# EAGLE board MSP_Lunchbox_OpenSource_v1 (EAGLE 9.5.2)
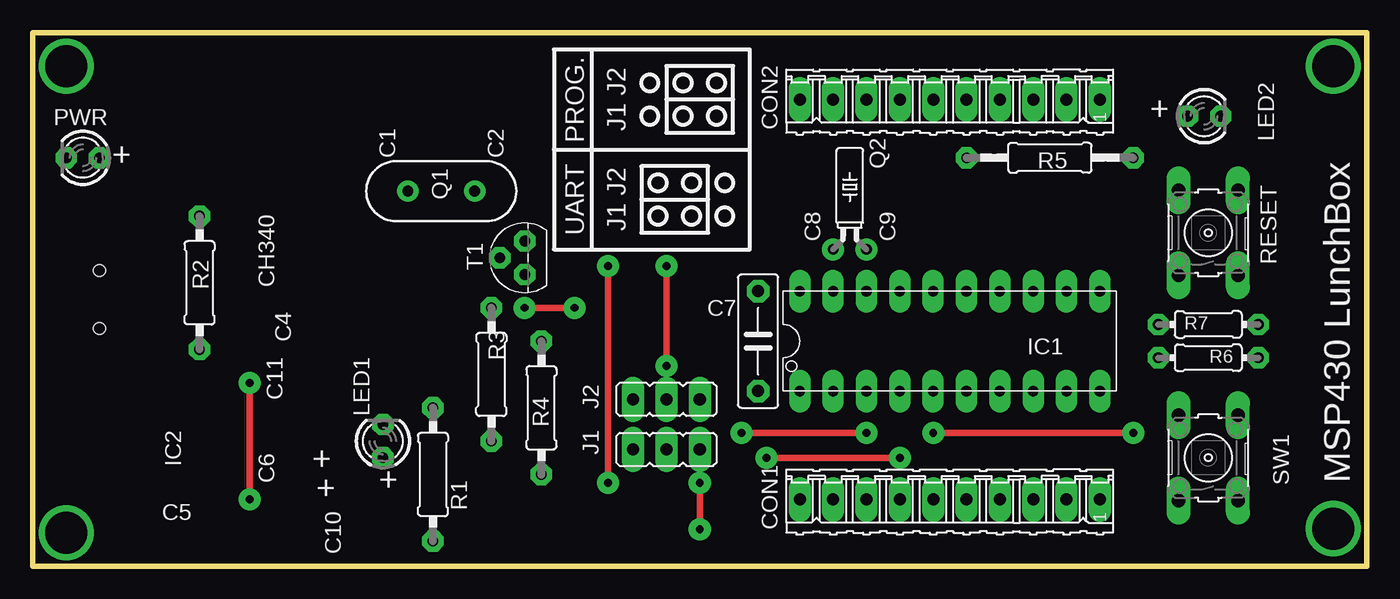
[diagram p0: board, top side]
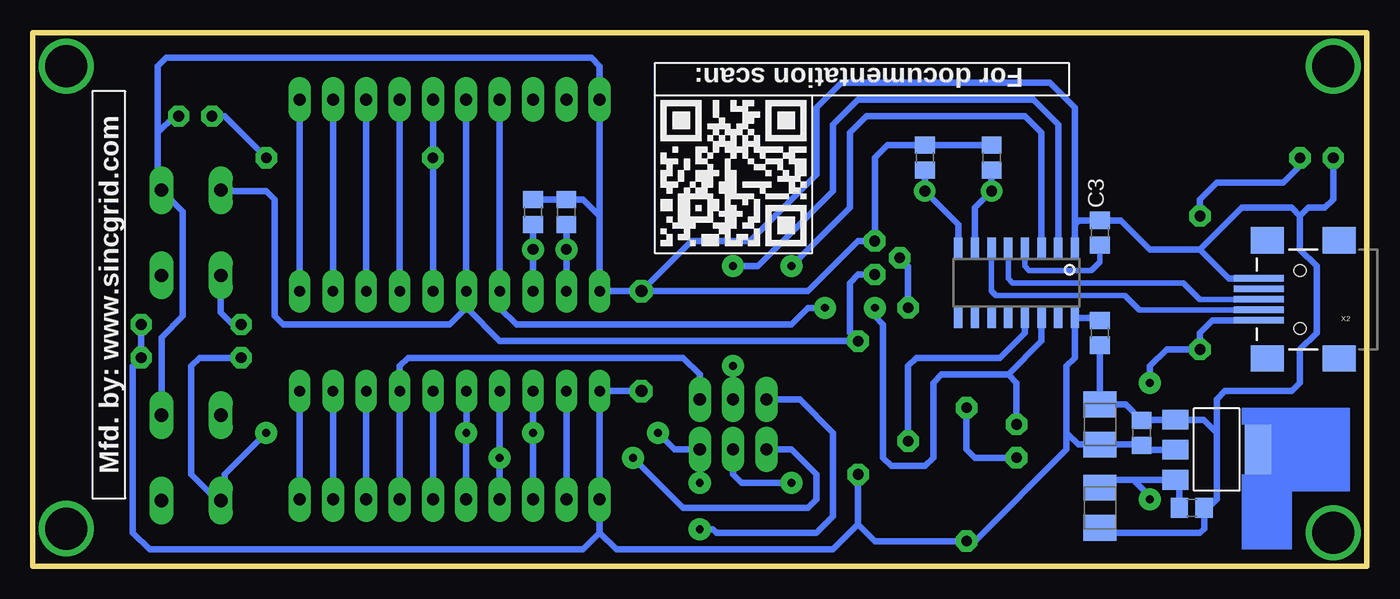
[diagram p1: board, bottom side, seen from below]

Size 101.6 x 40.64 mm. Coordinates in mm from the lower left corner, seen from the top.
Outline: 0,40.64 101.6,40.64 101.6,0 0,0 0,40.64
Copper layers (1*16): Top 0.035mm / dielectric 1.5mm / Bottom 0.035mm
Design rules "default *": minimum track width 10mil, minimum drill 24mil, track to track 16mil, track to pad 16mil, pad to pad 16mil, via to via 16mil, smd to smd 8mil, copper to edge 40mil, drill to drill 8mil, minimum pad ring 16mil, minimum via ring 8mil, stop-mask expansion 4mil, vias tented up to drill 0mil, thermal gap 10mil

## Footprints (pad centres in the part's own frame; a part is rotated, then mirrored left to right if it is on the bottom)
C0805 = smd 1.3 x 1.5: 1 -0.95,0; 2 0.95,0
C075-032X103 = drill 0.914 octagon: 1 -3.81,0; 2 3.81,0
B/3528-21R = smd 1.95 x 2.5: + 1.525,0; - -1.525,0
SOIC16 = smd 0.635 x 1.524: 1 -4.445,-2.695; 2 -3.175,-2.695; 3 -1.905,-2.695; 4 -0.635,-2.695; 5 0.635,-2.695; 6 1.905,-2.695; 7 3.175,-2.695; 8 4.445,-2.695; 9 4.445,2.695; 10 3.175,2.695; 11 1.905,2.695; 12 0.635,2.695; 13 -0.635,2.695; 14 -1.905,2.695; 15 -3.175,2.695; 16 -4.445,2.695
10P = drill 0.914 long: 1 -11.43,0; 2 -8.89,0; 3 -6.35,0; 4 -3.81,0; 5 -1.27,0; 6 1.27,0; 7 3.81,0; 8 6.35,0; 9 8.89,0; 10 11.43,0
G2553-DIP20 = drill 0.813 long: 1 -10.165,-3.81; 2 -7.625,-3.81; 3 -5.085,-3.81; 4 -2.545,-3.81; 5 -0.005,-3.81; 6 2.535,-3.81; 7 5.075,-3.81; 8 7.615,-3.81; 9 10.155,-3.81; 10 12.695,-3.81; 11 12.695,3.81; 12 10.155,3.81; 13 7.615,3.81; 14 5.075,3.81; 15 2.535,3.81; 16 -0.005,3.81; 17 -2.545,3.81; 18 -5.085,3.81; 19 -7.625,3.81; 20 -10.165,3.81
SOT223 = smd 1.499 x 2.007: 1 -2.261,-3.15; 2 0.025,-3.15; 3 2.311,-3.15 | smd 3.81 x 2.007: 4 0,3.15
JP2 = drill 0.914 long: 1 -2.54,0; 2 0,0; 3 2.54,0
LED3MM = drill 0.813 octagon: A -1.27,0; K 1.27,0
HC49US = drill 0.813: 1 -2.54,0; 2 2.54,0
TC26H = drill 0.813 pad 1.676: 1 -1.27,0; 2 1.27,0
0207/10 = drill 0.813 octagon: 1 -5.08,0; 2 5.08,0
0207/12 = drill 0.813 octagon: 1 -6.35,0; 2 6.35,0
0204/7 = drill 0.813 octagon: 1 -3.81,0; 2 3.81,0
B3F-10XX = drill 1.016 long: 1 -3.251,2.261; 2 3.251,2.261; 3 -3.251,-2.261; 4 3.251,-2.261
TO92 = drill 0.813 octagon: 1 1.27,0; 2 0,1.905; 3 -1.27,0
USB-MINIB = smd 3.81 x 0.5: D+ 3.135,0; D- 3.135,0.8; GND 3.135,-1.6; ID 3.135,-0.8; VBUS 3.135,1.6 | smd 2.5 x 2: GND@1 -3,-4.5; GND@2 -3,4.5; GND@3 2.5,4.5; GND@4 2.5,-4.5 | hole 0.9: 0,2.2; 0,-2.2

## Placement (x,y rotation side)
C1  22p  [C0805]  28.57,31.11 90 bottom
C2  22p  [C0805]  33.66,31.11 90 bottom
C3  0.1u  [C0805]  20.32,25.4 90 bottom
C4  0.1u  [C0805]  20.32,17.78 270 bottom
C5  0.1u  [C0805]  13.34,4.45 0 bottom
C6  0.1u  [C0805]  17.14,10.16 90 bottom
C7  0.1u  [C075-032X103]  55.24,17.14 90 top
C8  22p  [C0805]  60.96,26.99 90 bottom
C9  22p  [C0805]  63.5,26.99 90 bottom
C10  10u  [B/3528-21R]  20.32,4.45 90 bottom
C11  10u  [B/3528-21R]  20.32,10.79 270 bottom
CH340  CH340  [SOIC16]  26.67,21.59 180 bottom
CON1  [10P]  69.85,5.08 180 top
CON2  [10P]  69.85,35.56 180 top
IC1  MSP430G2553DIP20  [G2553-DIP20]  68.58,17.14 0 top
IC2  REG1117  [SOT223]  11.43,8.89 270 bottom
J1  [JP2]  48.26,8.89 180 top
J2  [JP2]  48.26,12.7 0 top
LED1  LED3MM  [LED3MM]  26.67,9.53 90 top
LED2  LED3MM  [LED3MM]  89.22,34.29 0 top
PWR  LED3MM  [LED3MM]  3.81,31.11 180 top
Q1  12MHz  [HC49US]  31.11,28.57 0 top
Q2  32KHz  [TC26H]  62.23,24.13 0 top
R1  1k  [0207/10]  30.48,6.99 90 top
R2  1k  [0207/10]  12.7,21.59 90 top
R3  1k  [0207/10]  34.92,14.61 90 top
R4  1k  [0207/10]  38.73,12.06 270 top
R5  1k  [0207/12]  77.47,31.11 0 top
R6  1k  [0204/7]  89.53,15.88 180 top
R7  1k  [0204/7]  89.53,18.41 180 top
RESET  OMRON_SWITCH_10-XX  [B3F-10XX]  89.53,25.4 90 top
SW1  OMRON_SWITCH_10-XX  [B3F-10XX]  89.53,8.26 90 top
T1  BC547  [TO92]  37.47,23.5 90 top
X2  USBSMD  [USB-MINIB]  5.08,20.32 180 bottom

## Library data of the parts
C1-C11 R1-R7 = rcl
CH340 = usb-serial
CON1 CON2 = con-amp-quick; OC_FARNELL: unknown; OC_NEWARK: unknown
IC1 IC2 Q2 RESET SW1 = CEDT_JANUARY_2015_v5
J1 J2 = jumper
LED1 LED2 PWR = CEDT_JANUARY_2015_v5_a
Q1 = CEDT_JANUARY_2015_v4
T1 = msp framework
X2 = CEDTv82

## Nets
1.0: CON1.9 IC1.2
1.1: CON1.8 IC1.3 J1.1 J2.1
1.2: CON1.7 IC1.4 J1.3
1.3: CON1.6 IC1.5 R6.2 SW1.1
1.4: CON1.5 IC1.6
1.5: CON1.4 IC1.7 J2.3
1.6: CON2.4 IC1.14
1.7: CON2.5 IC1.15 R5.1
2.0: CON1.3 IC1.8
2.1: CON1.2 IC1.9
2.2: CON1.1 IC1.10
2.3: CON2.1 IC1.11
2.4: CON2.2 IC1.12
2.5: CON2.3 IC1.13
+3V3: C4.1 C6.1 C7.1 C11.+ CH340.16 CON1.10 IC1.1 IC2.2 R1.1 R4.2 R6.1 R7.1
+5V: C5.1 C10.+ IC2.3 R2.1 X2.VBUS
DM: CH340.6 X2.D-
DP: CH340.5 X2.D+
DTR: CH340.13 R3.1
GND: C1.2 C2.2 C3.2 C4.2 C5.2 C6.2 C7.2 C8.2 C9.2 C10.- C11.- CH340.1 CON2.10 IC1.20 IC2.1 LED2.K PWR.K RESET.4 SW1.4 T1.1 X2.GND
N$1: LED1.A R1.2
N$2: PWR.A R2.2
N$3: C1.1 CH340.7 Q1.1
N$4: C2.1 CH340.8 Q1.2
N$5: LED2.A R5.2
N$6: R7.2 RESET.1
N$10: R3.2 T1.2
N$11: C3.1 CH340.4
N$14: CON2.9
N$15: CON2.8
RESET: CON2.6 IC1.16 R4.1 RESET.2 T1.3
RTS/TEST: CH340.14 CON2.7 IC1.17 LED1.K
RXD: CH340.3 J1.2
TXD: CH340.2 J2.2
XIN: C8.1 IC1.19 Q2.1
XOUT: C9.1 IC1.18 Q2.2

## Tracks (layer width: path | path; a pad name or v marks a point on that pad's centre or on a via)
1.0
  Bottom 0.508: IC1.2 CON1.9
1.1  (via drill 0.6 pad 1.68)
  Top 0.508: v53.98,10.16 v63.5,10.16 | v50.8,2.79 v50.8,6.35
  Bottom 0.508: IC1.3 v63.5,10.16 CON1.8 | J2.1 43.18,12.7 40.64,10.16 40.64,3.81 41.91,2.54 49.53,2.54 49.78,2.79 v50.8,2.79 | v50.8,6.35 J1.1 52.7,8.89 v53.98,10.16
1.2  (via drill 0.6 pad 1.68)
  Top 0.508: v55.88,8.26 v66.03,8.26
  Bottom 0.508: IC1.4 v66.03,8.26 v66.04,8.25 CON1.7 | J1.3 43.81,8.89 41.91,6.99 41.91,5.08 42.55,4.45 52.07,4.45 v55.88,8.26
1.3  (via drill 0.6 pad 1.68)
  Top 0.508: v68.58,10.16 v83.82,10.16
  Bottom 0.508: R6.2 88.9,15.88 89.53,15.24 89.53,6.99 87.55,5 SW1.1 87,5.28 87,6.99 v83.82,10.16 | IC1.5 v68.58,10.16 CON1.6
1.4
  Bottom 0.508: CON1.5 IC1.6
1.5
  Bottom 0.508: J2.3 50.8,14.61 52.07,15.88 73.03,15.88 73.66,15.24 IC1.7 CON1.4
1.6
  Bottom 0.508: CON2.4 IC1.14
1.7
  Bottom 0.508: CON2.5 R5.1 IC1.15
2.0
  Bottom 0.508: CON1.3 IC1.8
2.1
  Bottom 0.508: CON1.2 IC1.9
2.2
  Bottom 0.508: CON1.1 IC1.10
2.3
  Bottom 0.508: CON2.1 IC1.11
2.4
  Bottom 0.508: CON2.2 IC1.12
2.5
  Bottom 0.508: CON2.3 IC1.13
+3V3
  Bottom 0.508: C4.1 20.48,18.89 CH340.16 22.23,15.88 22.86,15.24 22.86,10.16 | R7.1 R6.1 93.98,15.24 93.98,2.54 92.71,1.27 59.69,1.27 58.42,2.54 | C7.1 IC1.1 CON1.10 58.42,2.54 | 58.42,2.54 57.15,1.27 40.64,1.27 38.73,3.17 | R4.2 38.73,3.17 | 38.73,3.17 37.47,1.91 R1.1 29.84,1.91 22.86,8.89 22.86,10.16 | 22.86,10.16 21.97,9.27 C11.+ 17.2,9.27 C6.1 16.8,8.87 IC2.2
+5V  (via drill 0.6 pad 1.68)
  Top 0.508: v16.51,13.97 v16.51,5.08
  Bottom 0.508: X2.VBUS 11.76,18.72 12.7,17.78 R2.1 15.24,16.51 16.51,15.24 v16.51,13.97 | 17.78,6.58 IC2.3 14.29,6.28 C5.1 | 17.78,6.58 19.71,6.58 C10.+ | v16.51,5.08 16.51,5.31 17.78,6.58
DM
  Bottom 0.406: CH340.6 28.57,20.95 28.26,20.64 18.41,20.64 17.3,19.52 X2.D-
DP
  Bottom 0.406: CH340.5 27.3,21.91 26.99,21.59 13.97,21.59 12.7,20.32 X2.D+
DTR
  Bottom 0.508: CH340.13 26.04,17.78 27.94,15.88 34.29,15.88 34.92,15.24 R3.1
GND
  Bottom 0.508: 22.23,26.04 21.91,26.35 C3.2 18.73,26.35 16.51,24.13 12.7,24.13 | 22.23,26.04 CH340.1 | C1.2 C2.2 36.52,32.06 37.47,31.11 T1.1 38.73,24.77 42.55,20.95 C7.2 | 12.7,24.13 10.49,21.92 X2.GND | C9.2 C8.2 59.69,27.94 58.42,26.67 | SW1.4 91.8,17.42 90.17,19.05 90.17,27.03 RESET.4 92.08,28.93 92.08,33.02 | C7.2 IC1.20 58.42,26.67 | 22.23,26.04 22.23,34.92 24.13,36.83 40.01,36.83 41.91,34.92 41.91,29.84 46.99,24.77 51.44,24.77 C7.2 | PWR.K 2.54,27.94 3.17,27.3 4.45,27.3 5.08,26.67 | 5.08,26.67 5.08,24.13 3.81,22.86 3.81,17.78 5.08,16.51 5.08,13.97 5.71,13.34 10.79,13.34 11.43,12.7 11.43,10.16 | 5.08,26.67 5.71,27.3 9.53,27.3 12.7,24.13 | C4.2 C11.- 18.36,12.32 C6.2 17.1,11.15 IC2.1 12.42,11.15 11.43,10.16 | C10.- 19.94,2.54 12.7,2.54 12.38,2.85 C5.2 12.06,4.45 11.43,5.08 11.43,10.16 | 58.42,26.67 CON2.10 58.42,38.1 59.05,38.73 91.44,38.73 92.08,38.1 92.08,33.02 | LED2.K 90.81,34.29 92.08,33.02
N$1
  Bottom 0.508: LED1.A 29.84,8.26 30.48,8.89 R1.2
N$2
  Bottom 0.508: PWR.A 5.08,30.48 6.35,29.21 11.43,29.21 12.7,27.94 R2.2
N$3
  Bottom 0.508: CH340.7 29.84,27.3 Q1.1 C1.1
N$4
  Bottom 0.508: CH340.8 31.11,26.04 Q1.2 C2.1
N$5
  Bottom 0.508: LED2.A 87,34.29 R5.2
N$6
  Bottom 0.508: RESET.1 87.27,19.33 86.36,18.41 R7.2
N$7  (via drill 3.2 pad 3.81)
  other vias: 99.06,38.1
N$8  (via drill 3.2 pad 3.81)
  other vias: 2.54,2.54
N$9  (via drill 3.2 pad 3.81)
  other vias: 2.54,38.1
N$10
  Bottom 0.508: R3.2 34.92,22.86 T1.2
N$11
  Bottom 0.406: CH340.4 26.04,22.86 25.72,22.54 20.95,22.54 20.32,23.18 C3.1
N$12  (via drill 3.2 pad 3.81)
  other vias: 99.06,2.86
RESET
  Bottom 0.508: 68.58,19.69 IC1.16 CON2.6 | 68.58,19.69 69.85,18.41 82.55,18.41 83.19,19.05 83.19,27.94 83.82,28.57 86.36,28.57 86.44,28.65 RESET.2 | 68.58,19.69 66.03,17.14 R4.1 39.37,17.78 39.37,21.59 38.73,22.23 T1.3
RTS/TEST  (via drill 0.6 pad 1.68)
  Top 0.508: v37.47,19.68 v41.27,19.68
  Bottom 0.508: v41.27,19.68 42.55,19.68 43.81,18.41 64.77,18.41 66.03,19.68 IC1.17 CON2.7 | v37.47,19.68 37.47,19.05 36.83,18.41 36.83,8.26 36.2,7.62 33.66,7.62 33.02,8.26 33.02,13.97 32.38,14.61 27.3,14.61 | CH340.14 24.77,17.14 27.3,14.61 | LED1.K 26.67,13.97 27.3,14.61
RXD  (via drill 0.6 pad 1.68)
  Top 0.508: v43.81,22.86 v43.81,6.35
  Bottom 0.508: CH340.3 24.77,33.02 25.72,33.97 26.04,34.29 38.1,34.29 39.37,33.02 39.37,27.3 v43.81,22.86 | v43.81,6.35 47.62,6.35 48.26,6.99 J1.2
TXD  (via drill 0.6 pad 1.68)
  Top 0.508: v48.26,15.24 v48.26,22.86
  Bottom 0.508: CH340.2 23.5,33.66 25.4,35.56 38.73,35.56 40.64,33.66 40.64,28.57 46.35,22.86 v48.26,22.86 | J2.2 v48.26,15.24
XIN
  Bottom 0.508: IC1.19 Q2.1 C8.1
XOUT
  Bottom 0.508: IC1.18 Q2.2 C9.1
(copper drawn outside any net)
  shapes: Bottom area x4

## Text on the board
tPlace: PROG. | J1 J2 | UART | J1 J2
bPlace: For documentation scan: | Mfd. by: www.sincgrid.com
tNames: + | + | + | + | MSP430 LunchBox | +